# Altium PCB Project_PCB.PcbDoc
Units mm, origin at the board's own origin, x right, y up, seen from the top; angles counter-clockwise.
Board outline 70.48 x 51.69 mm, 2 copper layers (Top Layer, Bottom Layer); 22 components, 31 nets, 91 pads, 0 vias.
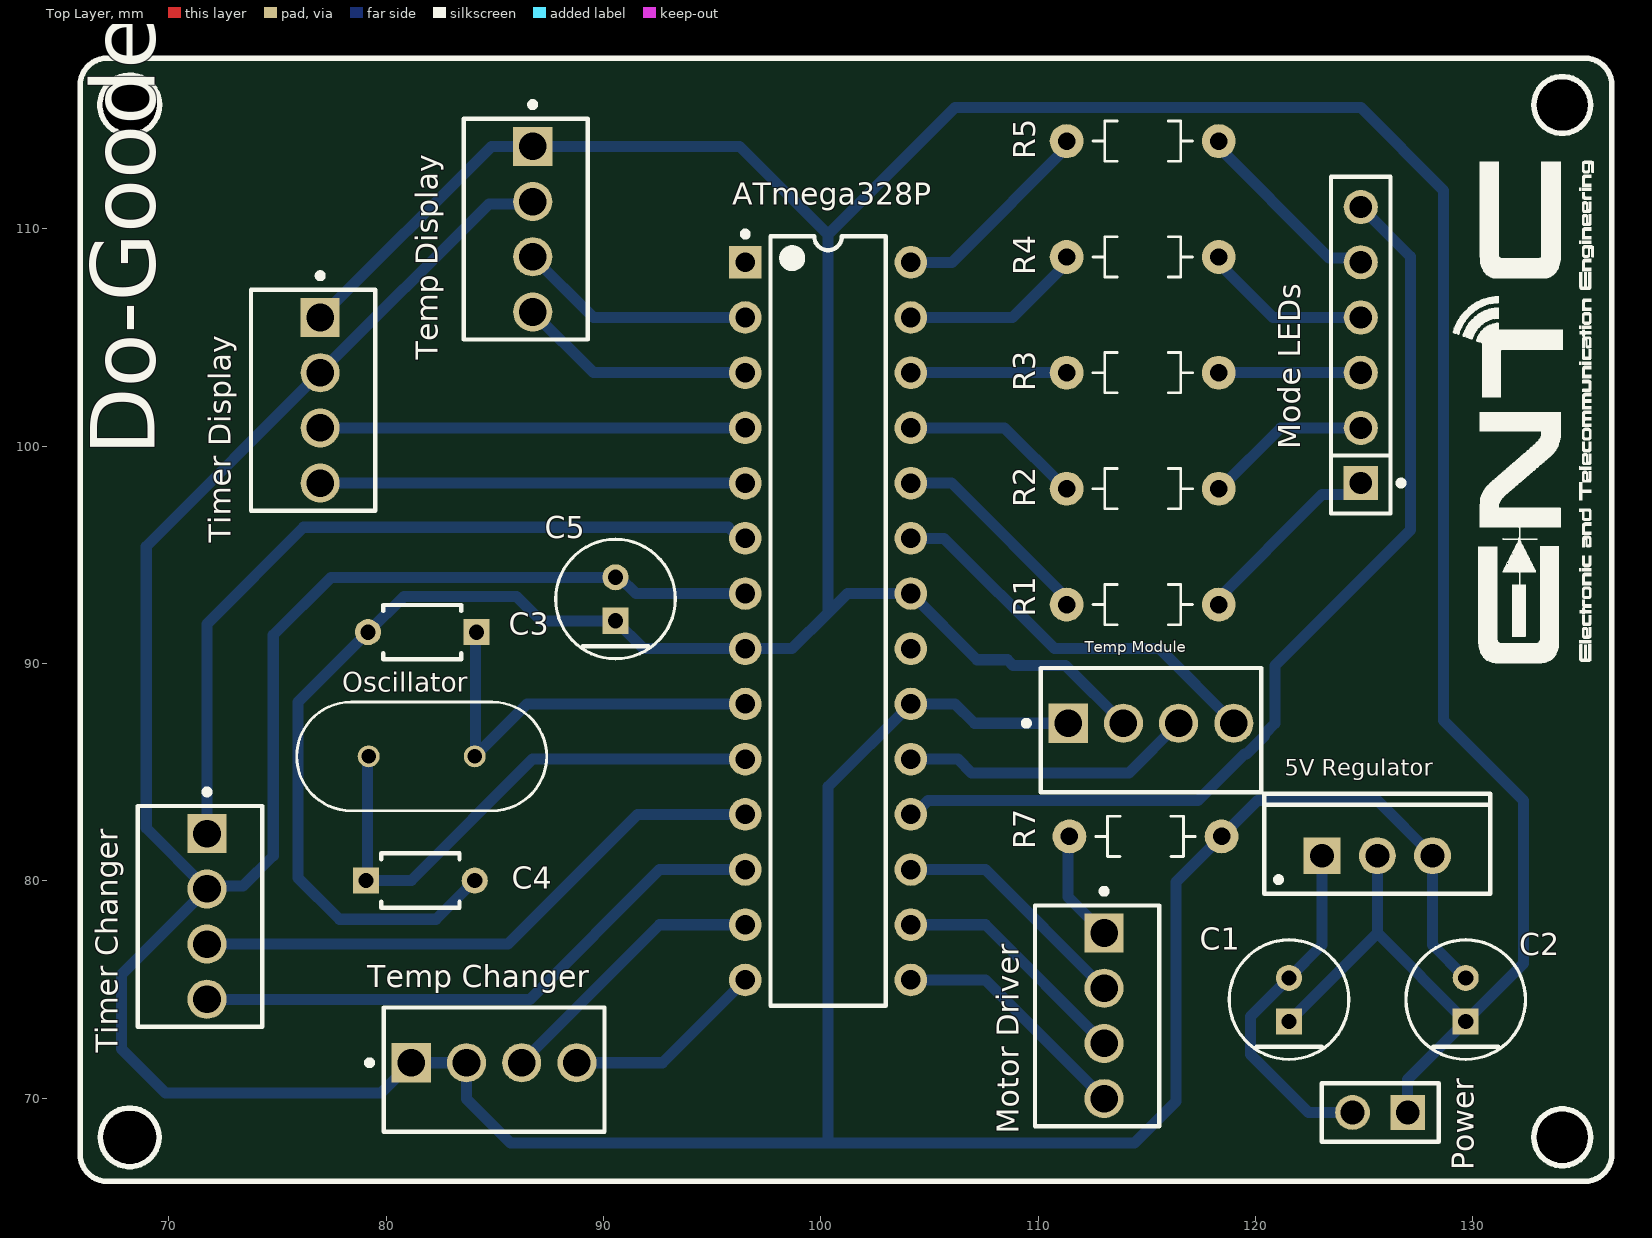
[diagram p0: Top Layer view]
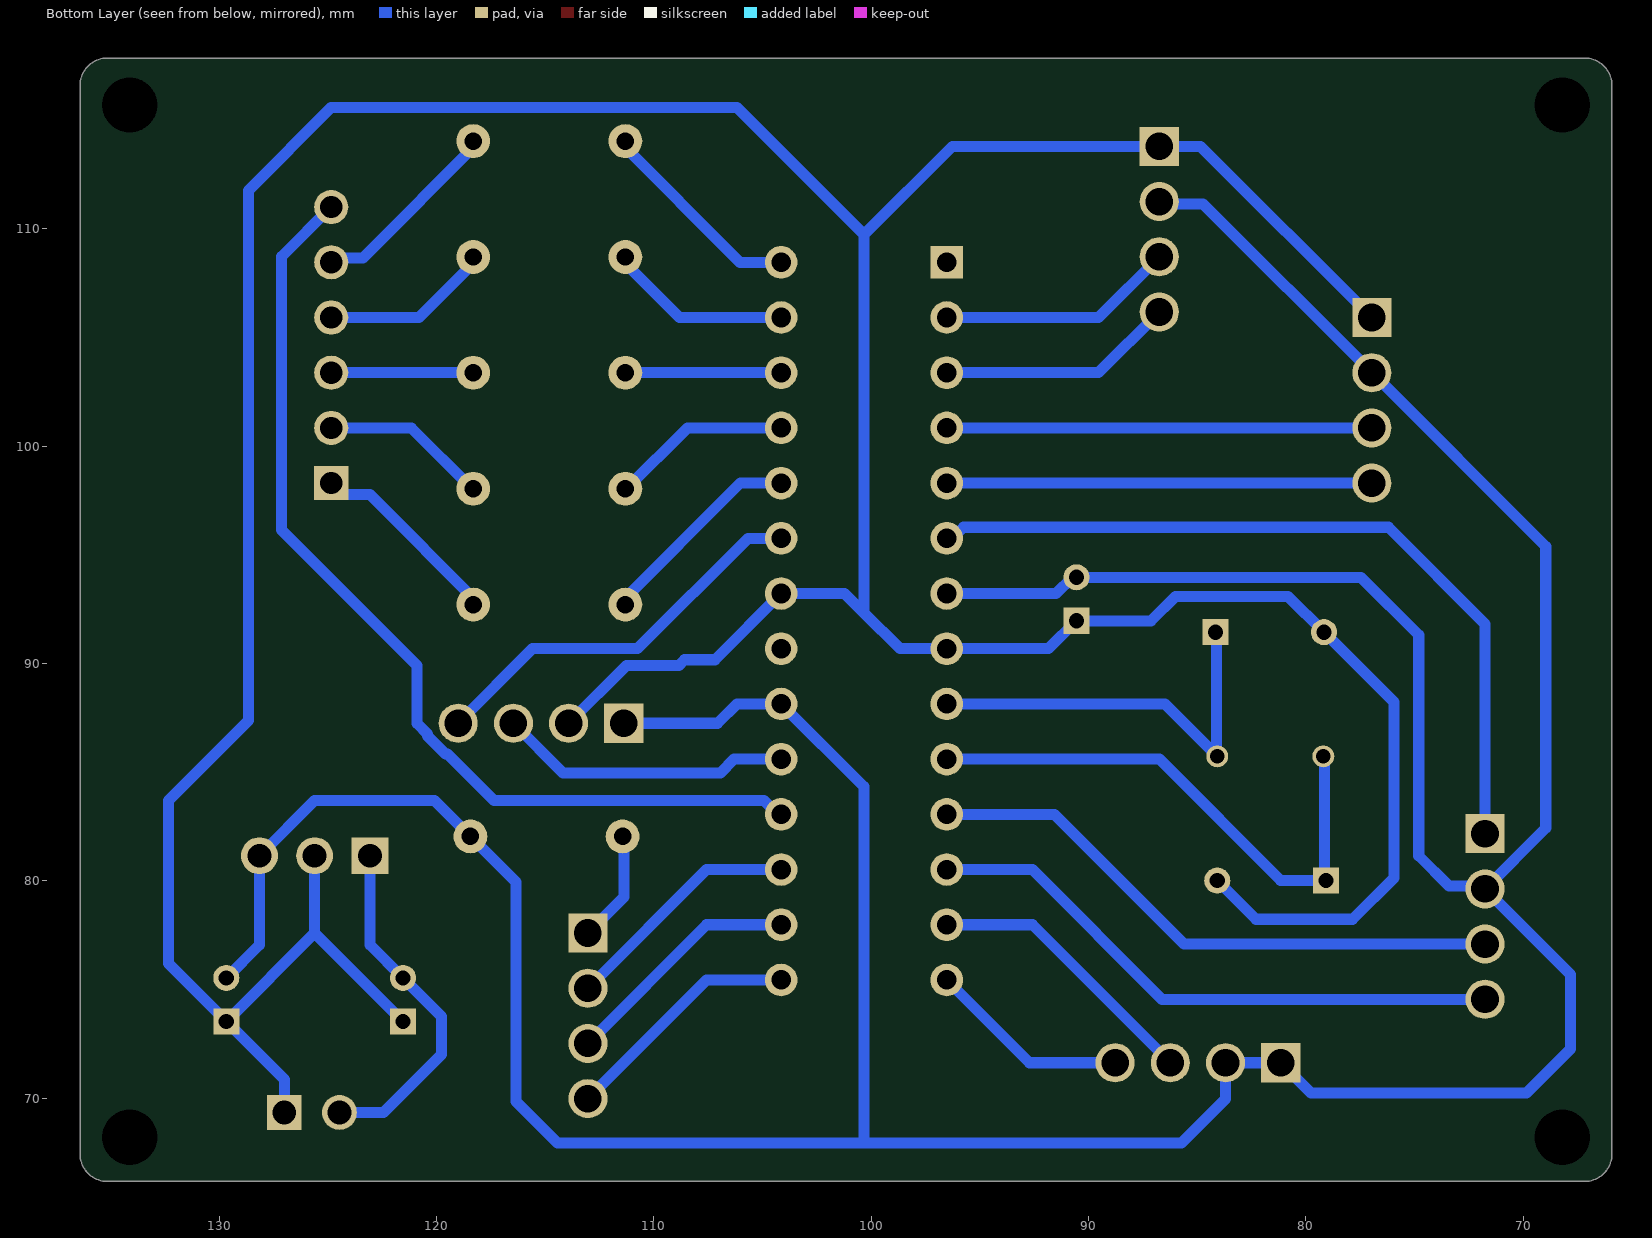
[diagram p1: Bottom Layer view, seen from below]
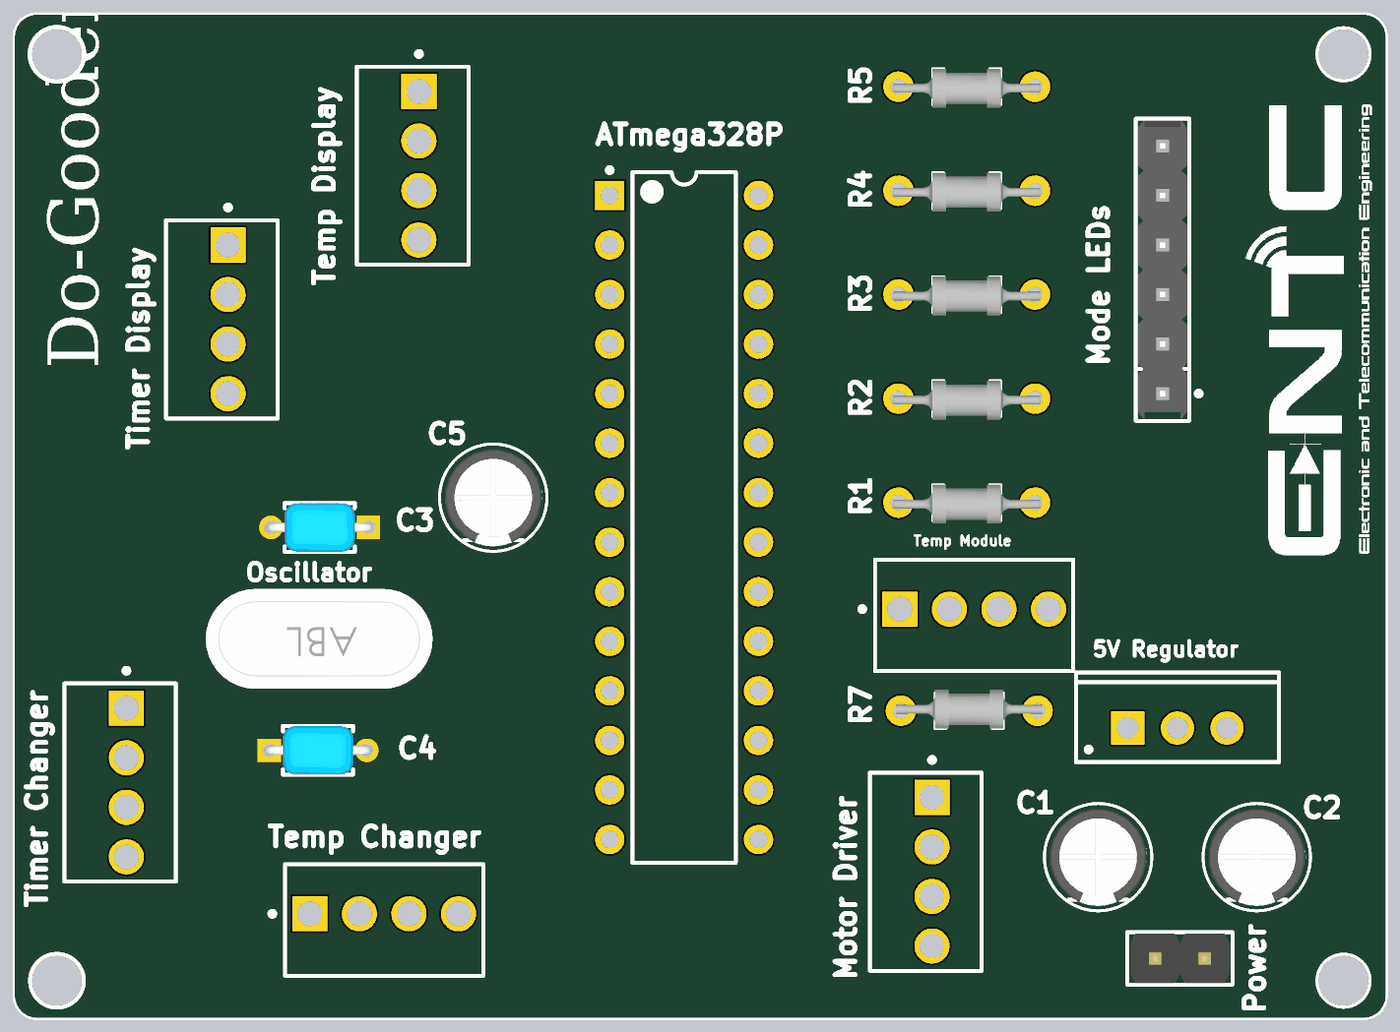
[diagram p2: 3D render of the assembled board from above, using the file's embedded part models]

## Layer stack, top to bottom
Top Solder: solder mask 0.0102, Solder Resist, Dk 3.5
Top Layer: signal copper 0.0356
Dielectric 1: dielectric 0.32, FR-4, Dk 4.8
Bottom Layer: signal copper 0.0356
Bottom Solder: solder mask 0.0102, Solder Resist, Dk 3.5

## Board outline
65.913,67.437 65.913,116.586 cw(c67.183,116.586) 67.183,117.856 135.128,117.856 cw(c135.128,116.586) 136.398,116.586 136.398,67.437 cw(c135.128,67.437) 135.128,66.167 67.183,66.167 cw(c67.183,67.437)

## Design rules (kind name [scope] priority, off if disabled: settings)
Clearance [All] p1: gap=0.254 ignorepadtopadclearanceinfootprint=FALSE except(0: Arc-Hole Track-Hole SMDPad-Hole THPad-Hole Via-Hole Fill-Hole Poly-Hole Region-Hole Text-Hole)
PolygonConnect [All] p1: connectstyle=Relief reliefconductorwidth=0.254 reliefentries=4 polygonreliefangle="90 Angle" airgapwidth=0.254
RoutingVias [All] p1: holewidth=0.711 width=1.27 viastyle="Through Hole" minholewidth=0.711 minwidth=1.27 maxholewidth=0.711 maxwidth=1.27
SolderMaskExpansion [All] p1: expansion=0.102 istentingtop=FALSE
Width [All] p1: maxlimit=0.762 minlimit=0.508 preferedwidth=0.762 minimp=50.000000 maximp=50.000000 favimp=50.000000
30 further rules are at their usual default settings.

## Components (designator, comment, footprint, x,y, rotation, side; value= is the part's Value field where it differs from the comment)
"5V Regulator" "" TO220 125.603,81.153 r0 top (schematic designator 7805)
ATmega328P "ATmega328-PU" 28P3 100.33,91.948 r0 top
C1 "10uf" FP-RAD-TH-D_5_0_5-L_11_1-MFG 121.539,74.533 r90 top
C2 "10uf" FP-RAD-TH-D_5_0_5-L_11_1-MFG 129.667,74.533 r90 top
C3 "22pf" FP-RCE0K1-MFG 81.661,91.44 r180 top
C4 "22pf" FP-RCE0K1-MFG 81.574,80.01 r0 top
C5 "10uf" FP-RAD-TH-D_5_0_5-L_11_1-MFG 90.551,92.964 r90 top
"Mode LEDs" "22-28-4060" FP-22-28-4060-MFG 124.841,104.648 r90 top
"Motor Driver" "640456-4" TECO-640456-4 113.03,73.787 r90 top (schematic designator "Motor Error Power")
Oscillator "ABL-16.000MHz-B4Y-T" XTAL_HC49P488W46L1150T500H350 81.634,85.725 r180 top (schematic designator 16.0MHz)
Power "61300211121" 61300211121 125.73,69.342 r180 top
R1 "1623928-4" RESAD700W45L350D185 114.808,92.71 r180 top
R2 "1623928-4" RESAD700W45L350D185 114.808,98.041 r180 top
R3 "1623928-4" RESAD700W45L350D185 114.808,103.378 r180 top
R4 "1623928-4" RESAD700W45L350D185 114.808,108.702 r180 top
R5 "1623928-4" RESAD700W45L350D185 114.808,114.033 r180 top
R7 "1623928-4" RESAD700W45L350D185 114.935,82.042 r0 top
"Temp Changer" "640456-4" TECO-640456-4 84.963,71.628 r180 top
"Temp Display" "640456-4" TECO-640456-4 86.741,109.982 r90 top
"Temp Module" "640456-4" TECO-640456-4 115.189,87.249 r180 top
"Timer Changer" "640456-4" TECO-640456-4 71.755,78.359 r90 top
"Timer Display" "640456-4" TECO-640456-4 76.962,102.108 r90 top

## Footprints (in the part's own frame and the unit in brackets; to place one, negate y for a bottom-side part, rotate by r counter-clockwise, add the part's x,y. Pads: shape width x height; smd on the part's side, far side on the other; paste and mask are expansions set on the pad)
28P3 [mm] "28-Pin Plastic Dual In-Line Package (PDIP)"
  rect 1.5x1.5 hole 0.9: 1(-3.81,16.51)
  round 1.5 hole 0.9: 2(-3.81,13.97) 3(-3.81,11.43) 4(-3.81,8.89) 5(-3.81,6.35) 6(-3.81,3.81) 7(-3.81,1.27) 8(-3.81,-1.27) 9(-3.81,-3.81) 10(-3.81,-6.35) 11(-3.81,-8.89) 12(-3.81,-11.43) 13(-3.81,-13.97) 14(-3.81,-16.51) 15(3.81,-16.51) 16(3.81,-13.97) 17(3.81,-11.43) 18(3.81,-8.89) 19(3.81,-6.35) 20(3.81,-3.81) 21(3.81,-1.27) 22(3.81,1.27) 23(3.81,3.81) 24(3.81,6.35) 25(3.81,8.89) 26(3.81,11.43) 27(3.81,13.97) 28(3.81,16.51)
  silkscreen extent -3.93,-17.7 2.65,17.93, body extent -3.6,-17.65 3.6,17.65, height 4.58
61300211121 [mm] "Pin Header, pitch 2.54 mm, THT, Vertical, single row, 2p"
  rect 1.6x1.6 hole 1.1: 1(-1.27,0)
  round 1.6 hole 1.1: 2(1.27,0)
  silkscreen extent -2.69,-1.34 2.69,1.34, body extent -2.54,-1.27 2.54,1.27, height 8.57
FP-22-28-4060-MFG [mm]
  rect 1.57x1.57 hole 1.02 paste-1000 mask+0: 1(-6.35,0)
  round 1.57 hole 1.02 paste-1000 mask+0: 2(-3.81,0) 3(-1.27,0) 4(1.27,0) 5(3.81,0) 6(6.35,0)
  silkscreen extent -7.75,-1.97 7.75,1.37, body extent -7.85,-1.47 7.85,1.47, height 0.25
FP-RAD-TH-D_5_0_5-L_11_1-MFG [mm]
  rect 1.2x1.2 hole 0.7 paste-1000 mask+0: 1(-1,0)
  round 1.2 hole 0.7 paste-1000 mask+0: 2(1,0)
  silkscreen extent -2.75,-2.75 2.75,2.75, body extent -2.85,-2.85 2.85,2.85, height 0.25
FP-RCE0K1-MFG [mm]
  rect 1.2x1.2 hole 0.7 paste-1000 mask+0: 1(-2.5,0)
  round 1.2 hole 0.7 paste-1000 mask+0: 2(2.5,0)
  silkscreen extent -1.8,-1.25 1.8,1.25, body extent -3.2,-1.35 3.2,1.35, height 0.25
RESAD700W45L350D185 [mm]
  round 1.558 hole 0.8: 1(-3.5,0) 2(3.5,0)
  silkscreen extent -2.29,-0.92 2.29,0.92, body extent -3.75,-0.92 3.75,1.08, height 0.99
TECO-640456-4 [mm] "Through Hole, 4-Leads, Body 10.16x5.72mm, Pitch 2.54mm"
  rect 1.8x1.8 hole 1.27 paste+0: 1(3.81,0)
  round 1.8 hole 1.27 paste+0: 2(1.27,0) 3(-1.27,0) 4(-3.81,0)
  silkscreen extent -5.08,-2.54 5.86,3.18, body extent -5.08,-2.54 5.08,3.18, height 10.03
TO220 [mm] "TO, Thru-Hole, Vertical, Heatsink Mounted; 3 In-Line Leads; Pitch 2.54 mm"
  rect 1.7x1.7 hole 1.1: 1(-2.54,0)
  round 1.7 hole 1.1: 2(0,0) 3(2.54,0)
  silkscreen extent -5.2,-1.75 5.2,2.85, body extent -5.25,-1.8 5.25,2.9, height 19.7
XTAL_HC49P488W46L1150T500H350 [mm]
  round 1.007 hole 0.657: 1(-2.44,0) 2(2.44,0)
  silkscreen extent -5.75,-2.5 5.75,2.5, body extent -5.75,-2.5 5.75,2.5, height 3.25

## Part data
"5V Regulator": library part CMP-0244-00483-1, "Positive Voltage Regulator, 5V, 3-Pin TO-220", ComponentLink1Description="Manufacturer URL", ComponentLink1URL=http://www.st.com, ComponentLink2Description=Datasheet, ComponentLink2URL=http://www.st.com/internet/com/TECHNICAL_RESOURCES/TECHNICAL_LITERATURE/DATASHEET/CD00000444.pdf, ComponentLink3Description="Package Specification", ComponentLink3URL=http://www.st.com/internet/com/TECHNICAL_RESOURCES/TECHNICAL_LITERATURE/PACKAGE_INFORMATION/CD00004649.pdf, DatasheetVersion=16/11/2011, PackageDescription="TO, Thru-Hole, Vertical, Heatsink Mounted; 3 In-Line Leads; Pitch 2.54 mm", PackageReference=TO220, PackageVersion=ver3.0
ATmega328P: library part CMP-0095-00015-2, "8-bit AVR Microcontroller, 32KB Flash, 1KB EEPROM, 2KB SRAM, 28-pin PDIP, Industrial Grade (-40°C to 85°C)", ComponentLink1Description="Manufacturer URL", ComponentLink1URL=http://www.atmel.com/, ComponentLink2Description="ATmega48A/48PA/88A/88PA/168A/168PA/328/328P Datasheet", ComponentLink2URL=http://www.atmel.com/dyn/resources/prod_documents/8271.pdf, ComponentLink3Description="ATmega48A/48PA/88A/88PA/168A/168PA/328/328P Summary", ComponentLink3URL=http://www.atmel.com/dyn/resources/prod_documents/8271S.pdf, DatasheetVersion="revD, May-2011", PackageDescription="28-lead (0.300\"/7.62mm Wide) Plastic Dual Inline Package (PDIP)", PackageReference=28P3, PackageVersion="revB, Sep-2001", RevisionNote="DatasheetVersion updated. URLs added."
C1 C2 C5: library part CMP-05427-001989-1, "Aluminum Electrolytic Capacitors (Radial Lead Type) AEC-Q200 Qualified 22uF ±20% 50V", Capacitance=22uF, Case/Package=Radial, ESR (Equivalent Series Resistance)=1.3R, Leakage Current=3uA, Max Operating Temperature=105°C, Min Operating Temperature=-55°C, Package Quantity=2000, Ripple Current=155mA, Tolerance=20%, Voltage Rating=50V, Contact Plating=Tin, Diameter=5mm, Features="General Purpose", Height=11mm, Height - Seated (Max)=0.472inch, Impedance=1.3R, Lead Diameter=0.5mm, Lead Pitch=0.197inch, Length=11mm, Life (Hours)=1000Hour, Mount="Through Hole", Packaging="Tape and Reel", Polarity=Polar, Radiation Hardening=No, RoHS Compliant=Yes, Series=FC, Termination=Radial, Voltage Rating (DC)=50V
C3 C4: library part CMP-06035-004895-1, "Cap Ceramic 22pF 50V C0G ±5% Radial 5mm +125°C Automotive Bulk", Capacitance=22pF, Case/Package=Radial, Dielectric=C0G, Max Operating Temperature=125°C, Min Operating Temperature=-55°C, Package Quantity=2000, Ratings=AEC-Q200, Resistor Type=Ceramic, Tolerance=5%, Voltage Rating=50V, Height=3.5mm, Height - Seated (Max)=0.138inch, Lead Diameter=0.5mm, Lead Pitch=0.197inch, Lead/Base Style="Formed Leads", Length=0.142inch, Mount="Through Hole", Packaging="Tape and Reel", Termination=Radial, Voltage Rating (DC)=50V, Width=0.098inch
"Mode LEDs": library part CMP-04776-000763-1, "CONN HEADER VERT 6POS 2.54MM", Color=Black, Contact Resistance=20mR, Current Rating=4A, Max Operating Temperature=75°C, Max Voltage Rating (AC)=250V, Max Voltage Rating (DC)=250.25kV, Min Operating Temperature=0°C, Package Quantity=1, Connector Type="Male Pin", Contact Material=Brass, Contact Mating Length=0.24inch, Contact Plating=Tin, Contact Type="Male Pin", Depth=2.49mm, Gender=Male, Housing Color=Black, Housing Material=Thermoplastic, Length=15.24mm, Mount="Through Hole", Number of Contacts=6, Number of Positions=6, Number of Rows=1, Orientation=Straight, Packaging=Bulk, Pitch=2.54mm, RoHS Compliant=Yes, Series="KK® 42375", Termination=Solder, Voltage Rating=250V
"Motor Driver" "Temp Changer" "Temp Display" "Temp Module" "Timer Changer" "Timer Display": library part CMP-2000-05419-1, "Male Header, Pitch 2.54 mm, 1 x 4 Position, Height 10.03 mm, Tail Length 3.56 mm, RoHS, Bulk", Color=White, Current, Rating="5 /  / A", Flammability Rating=UL94V-0, Manufacturer="TE Connectivity", Temperature, Operating="-55to+105 /  / degC", Voltage, Rating="250 /  / V", Agency Approvals=CSA,UL, Angle=Straight, Brand/Series=MTA-100Series, Color, Housing=White, Connector Type=MTA-100, Contact Centerline Spacing="0.100 /  / in.", Contact Mating Area Plating=Tin, Contact Plating=Tin, Contact Shape=Square, Contact Termination Area Plating=Tin, Datasheet URL=https://datasheet.ciiva.com/16286/eng-ds-82056-mta-0608-16286228.pdf, Datasheet Version=Dec-14, Length, Overall="0.4 /  / \"", Length, Pin="0.14 /  / \"", Length, Terminal Post="0.14 /  / in.", Manufacturer URL=http://www.te.com/, Material, Contact=CopperAlloy, Material, Housing=Polyester, Mount Angle=Vertical, Mounting Hole Size="0.04 /  / \"", Mounting Type=PCMount, Number of Contacts=4, Number of Positions=4, Number of Rows=1, Pin Spacing="0.1 /  / \"", Primary Type=InterconnectSystem, Size, Post="0.025 /  / in.", Special Features=Pinstrip, Standards=RoHSCompliant,ELVCompliant,UL94V-0, Termination=Solder, Type=PCBPlug
Oscillator: "16MHz Â±30ppm Crystal 18pF 40 Ohms HC-49/US", Package="HC-49/US ABRACON", Availability="In Stock", Check_prices=https://www.snapeda.com/parts/ABL-16.000MHz-B4Y/Abracon+LLC/view-part/?ref=eda, MF="Abracon LLC", MP=ABL-16.000MHz-B4Y, Price=None, Purchase-URL=https://pricing.snapeda.com/search/part/ABL-16.000MHz-B4Y/?ref=eda, SnapEDA_Link=https://www.snapeda.com/parts/ABL-16.000MHz-B4Y/Abracon+LLC/view-part/?ref=snap
Power: library part CMP-1712-00002-4, "THT Vertical Pin Header WR-PHD, Pitch 2.54 mm, Single Row, 2 pins", Contact Resistance=20mOhm, Manufacturer="Wurth Elektronik", Operating Temperature=-40to105degC, Rated Current=3A, Withstanding Voltage=500VAC, Working Voltage=250VAC, Datasheet URL=https://katalog.we-online.de/em/datasheet/6130xx11121.pdf, Gender=Male, Manufacturer URL=http://www.we-online.de, Mounting Technology=THT, Orientation=Vertical, Package Reference=61300211121, Packaging=Bag, Part Number=61300211121, Pin Number=2, Pitch=2.54mm, Publisher=WurthElektronik, Row Number=Single
R1 R2 R3 R4 R5 R7: "CFR16 5% 10K", Package=None, Availability=Unavailable, MP=1623928-4, Price=None

## Free pads (board coordinates)
  round 1.524 hole 2.54: 1(68.199,115.697) 2(134.112,115.697) 3(134.112,68.199) 4(68.199,68.199)

## Nets (pads, with @x,y where several pads share a name; then routed paths per layer and width w, separated by ;. In a path a pad name is that pad's centre, name@x,y a point inside that pad or via, vN(x,y) a via of type N, cw(c..) or ccw(c..) an arc to the next point about the centre after c; other vN are vias at no path point)
2/D0: "Temp Display.3" ATmega328P.2 | length 10.9
  Bottom Layer w0.508: 86.741,108.712 89.535,105.918 ATmega328P.2
3/D1: "Temp Display.4" ATmega328P.3 | length 10.9
  Bottom Layer w0.508: 86.741,106.172 89.535,103.378 ATmega328P.3
4/D2: "Timer Display.3" ATmega328P.4 | length 19.6
  Bottom Layer w0.508: 76.962,100.838 ATmega328P.4
5/D3: "Timer Display.4" ATmega328P.5 | length 19.6
  Bottom Layer w0.508: 76.962,98.298 ATmega328P.5
5V: "5V Regulator.3" "Temp Changer.1" "Temp Changer.2" "Temp Display.2" "Temp Module.1" "Timer Changer.2" "Timer Display.2" ATmega328P.7 ATmega328P.20 C2.2 C5.2 R7.2 | length 200.6
  Bottom Layer w0.508: 86.741,111.252 86.634,111.145 84.729,111.145 76.962,103.378 68.961,95.377 68.961,82.423 71.755,79.629 ; ATmega328P.7 91.484,93.218 90.738,93.964 C5.2 77.454,93.964 74.803,91.313 74.803,81.153 73.417,79.767 71.893,79.767 71.755,79.629 ; 111.379,87.249 107.061,87.249 106.172,88.138 ATmega328P.20 100.33,84.328 100.33,67.945 ; C2.2 128.143,77.057 128.143,81.153 125.603,83.693 120.086,83.693 116.332,79.939 116.332,69.85 114.427,67.945 100.33,67.945 ; 71.755,79.629 67.818,75.692 67.818,72.263 69.85,70.231 79.756,70.231 81.153,71.628 83.693,71.628 83.704,71.617 83.704,69.966 85.725,67.945 100.33,67.945
6/D4: "Timer Changer.1" ATmega328P.6 | length 36.5
  Bottom Layer w0.508: 71.755,82.169 71.755,91.821 76.2,96.266 95.744,96.266 96.252,95.758 ATmega328P.6
9: ATmega328P.9 C3.1 Oscillator.1 | length 19.1
  Bottom Layer w0.508: Oscillator.1 Oscillator.1@84.117,85.768 ; C3.1 84.117,91.397 Oscillator.1@84.117,85.768 ; ATmega328P.9 86.487,88.138 Oscillator.1@84.117,85.768
10: ATmega328P.10 C4.1 Oscillator.2 | length 25.5
  Bottom Layer w0.508: Oscillator.2 79.134,85.665 79.134,80.07 C4.1 81.153,80.01 86.741,85.598 ATmega328P.10
11/D5: "Timer Changer.3" ATmega328P.11 | length 27.2
  Bottom Layer w0.508: 71.755,77.089 85.598,77.089 91.567,83.058 ATmega328P.11
12/D6: "Timer Changer.4" ATmega328P.12 | length 27.2
  Bottom Layer w0.508: 71.755,74.549 86.614,74.549 92.583,80.518 ATmega328P.12
13/D7: "Temp Changer.3" ATmega328P.13 | length 12.9
  Bottom Layer w0.508: 86.233,71.628 92.583,77.978 ATmega328P.13
14/D8: "Temp Changer.4" ATmega328P.14 | length 9.3
  Bottom Layer w0.508: 88.773,71.628 92.71,71.628 ATmega328P.14
15/D9: "Motor Driver.4" ATmega328P.15 | length 11.2
  Bottom Layer w0.508: ATmega328P.15 107.569,75.438 113.03,69.977
16/D10: "Motor Driver.3" ATmega328P.16 | length 11.2
  Bottom Layer w0.508: ATmega328P.16 107.569,77.978 113.03,72.517
17/D11: "Motor Driver.2" ATmega328P.17 | length 11.2
  Bottom Layer w0.508: ATmega328P.17 107.569,80.518 113.03,75.057
18/D12: "Mode LEDs.6" ATmega328P.18 | length 45.8
  Bottom Layer w0.508: ATmega328P.18 104.299,83.058 104.934,83.693 117.348,83.693 119.496,85.841 119.582,85.841 120.407,86.666 120.407,86.752 120.904,87.249 120.904,89.916 127.127,96.139 127.127,108.712 124.841,110.998
19/D13: "Temp Module.3" ATmega328P.19 | length 13.5
  Bottom Layer w0.508: ATmega328P.19 106.299,85.598 106.934,84.963 114.173,84.963 116.459,87.249
22: "5V Regulator.2" "Temp Display.1" "Temp Module.2" "Timer Display.1" ATmega328P.8 ATmega328P.22 C1.1 C2.1 C3.2 C4.2 C5.1 Power.1 | length 201.5
  Bottom Layer w0.508: 76.962,105.918 84.836,113.792 86.741,113.792 96.266,113.792 100.33,109.728 ; C4.2 82.296,78.232 77.851,78.232 75.946,80.137 75.946,88.225 C3.2 80.812,93.091 86.004,93.091 87.131,91.964 C5.1 91.837,90.678 ATmega328P.8 98.679,90.678 100.33,92.329 ; 113.919,87.249 111.252,89.916 108.839,89.916 108.585,90.17 107.188,90.17 ATmega328P.22 101.219,93.218 100.33,92.329 ; C1.1 125.603,77.597 ; 125.603,81.153 125.603,77.597 ; Power.1 127,70.866 C2.1 ; 100.33,92.329 100.33,109.728 ; 100.33,109.728 106.172,115.57 124.841,115.57 128.651,111.76 128.651,87.376 132.334,83.693 132.334,76.2 C2.1 ; 125.603,77.597 C2.1
24/A1: ATmega328P.24 R1.2 | length 9.8
  Bottom Layer w0.508: ATmega328P.24 106.02,98.298 R1.2@111.608,92.71
25/A2: ATmega328P.25 R2.2 | length 8.3
  Bottom Layer w0.508: ATmega328P.25 108.458,100.838 R2.2@111.252,98.044
26/A3: ATmega328P.26 R3.2 | length 7.5
  Bottom Layer w0.508: ATmega328P.26@104.143,103.375 ATmega328P.26 R3.2@111.608,103.378
27/A4: ATmega328P.27 R4.2 | length 8.6
  Bottom Layer w0.508: ATmega328P.27 108.824,105.918 R4.2@111.608,108.702
28/A5: ATmega328P.28 R5.2 | length 9.8
  Bottom Layer w0.508: ATmega328P.28 106.033,108.458 R5.2@111.608,114.033
A0: "Temp Module.4" ATmega328P.23 | length 18.4
  Bottom Layer w0.508: ATmega328P.23 105.664,95.758 110.744,90.678 115.57,90.678 118.999,87.249
Net7805_1: "5V Regulator.1" C1.2 Power.2 | length 16.3
  Bottom Layer w0.508: 123.063,81.153 123.063,77.057 C1.2 119.761,73.755 119.761,72.009 122.428,69.342 Power.2
"NetMode LEDs_1": "Mode LEDs.1" R1.1 | length 9.1
  Bottom Layer w0.508: R1.1@118.008,92.71 123.065,97.767 124.31,97.767 124.841,98.298
"NetMode LEDs_2": "Mode LEDs.2" R2.1 | length 7.6
  Bottom Layer w0.508: R2.1@118.364,98.044 121.158,100.838 124.841,100.838
"NetMode LEDs_3": "Mode LEDs.3" R3.1 | length 6.8
  Bottom Layer w0.508: R3.1@118.008,103.378 124.841,103.378 124.838,103.375
"NetMode LEDs_4": "Mode LEDs.4" R4.1 | length 8
  Bottom Layer w0.508: R4.1@118.008,108.702 120.792,105.918 124.841,105.918
"NetMode LEDs_5": "Mode LEDs.5" R5.1 | length 9.1
  Bottom Layer w0.508: R5.1@118.008,114.033 123.38,108.661 124.638,108.661 124.841,108.458
"NetMotor Error Power_1": "Motor Driver.1" R7.1 | length 5.1
  Bottom Layer w0.508: R7.1@111.379,82.048 111.379,79.248 113.03,77.597
pads on no net: ATmega328P.1 ATmega328P.21

## Silkscreen, mask and mechanical layers (free items; w line width, h text height)
Top Overlay:
  drawing of 65 lines, arcs and shapes, not listed
  text "Do-Gooders" at 70.306,99.568 h5.08 r90